# Altium PCB compactModalAccel.PcbDoc
Units mil, origin at the board's own origin, x right, y up, seen from the top; angles counter-clockwise.
Board outline 999.85 x 999.81 mil, 2 copper layers (Top Layer, Bottom Layer), stack 64.611 mil thick; 19 components, 17 nets, 78 pads, 6 vias.
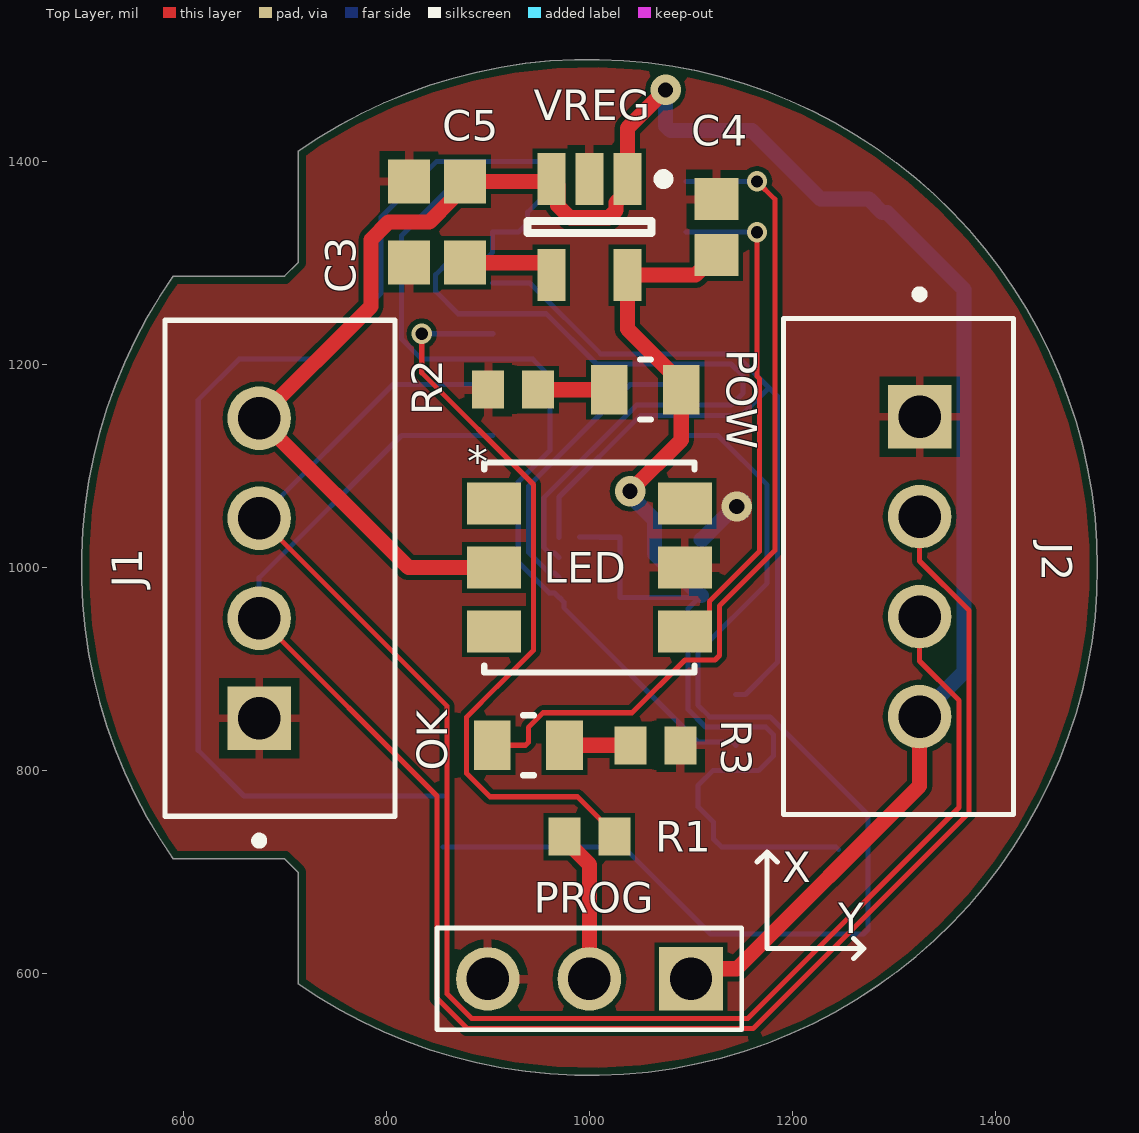
[diagram p0: Top Layer view]
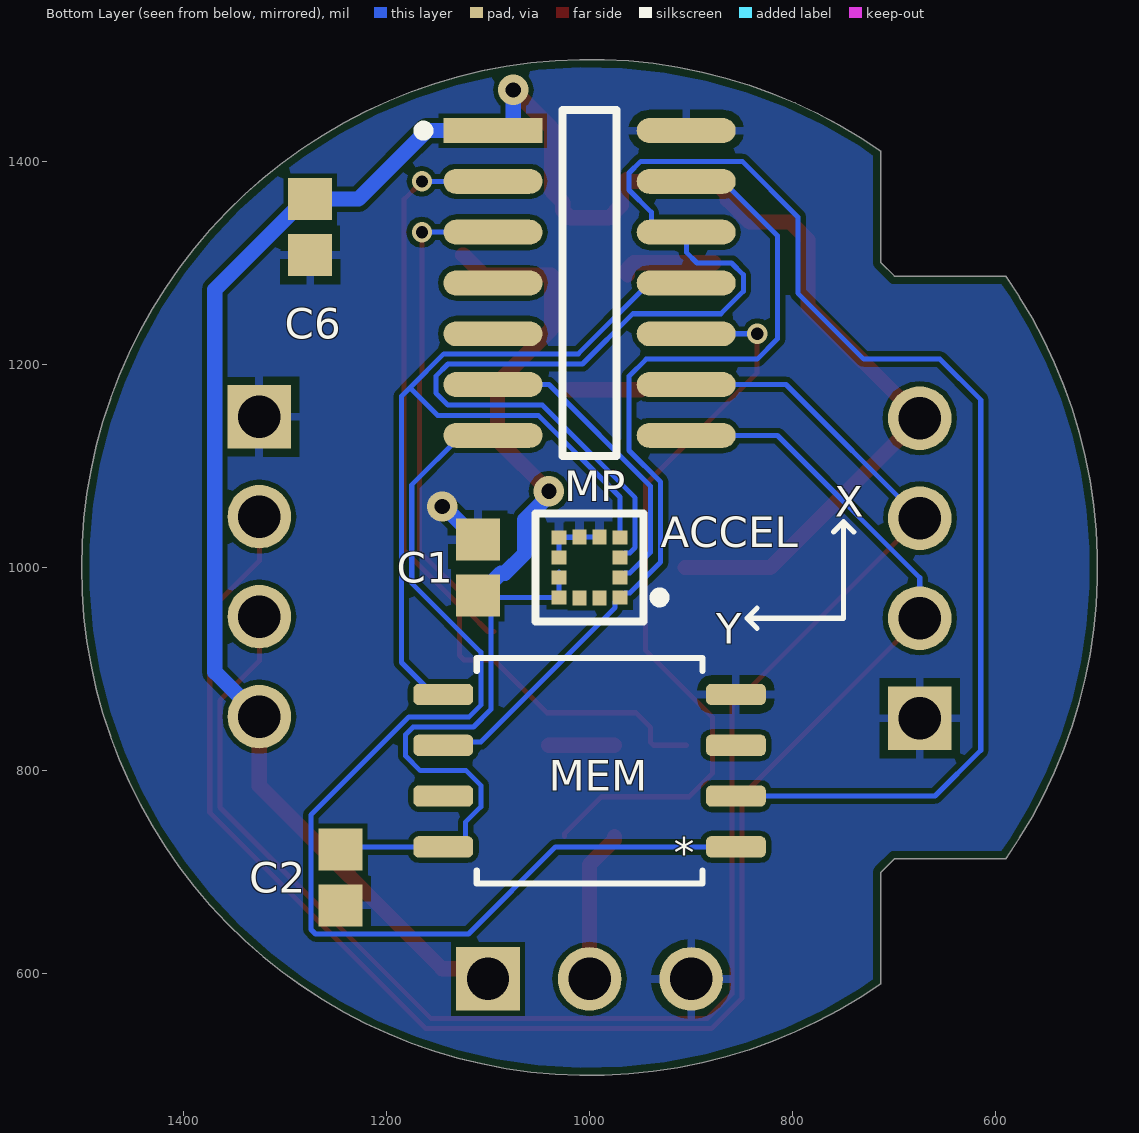
[diagram p1: Bottom Layer view, seen from below]
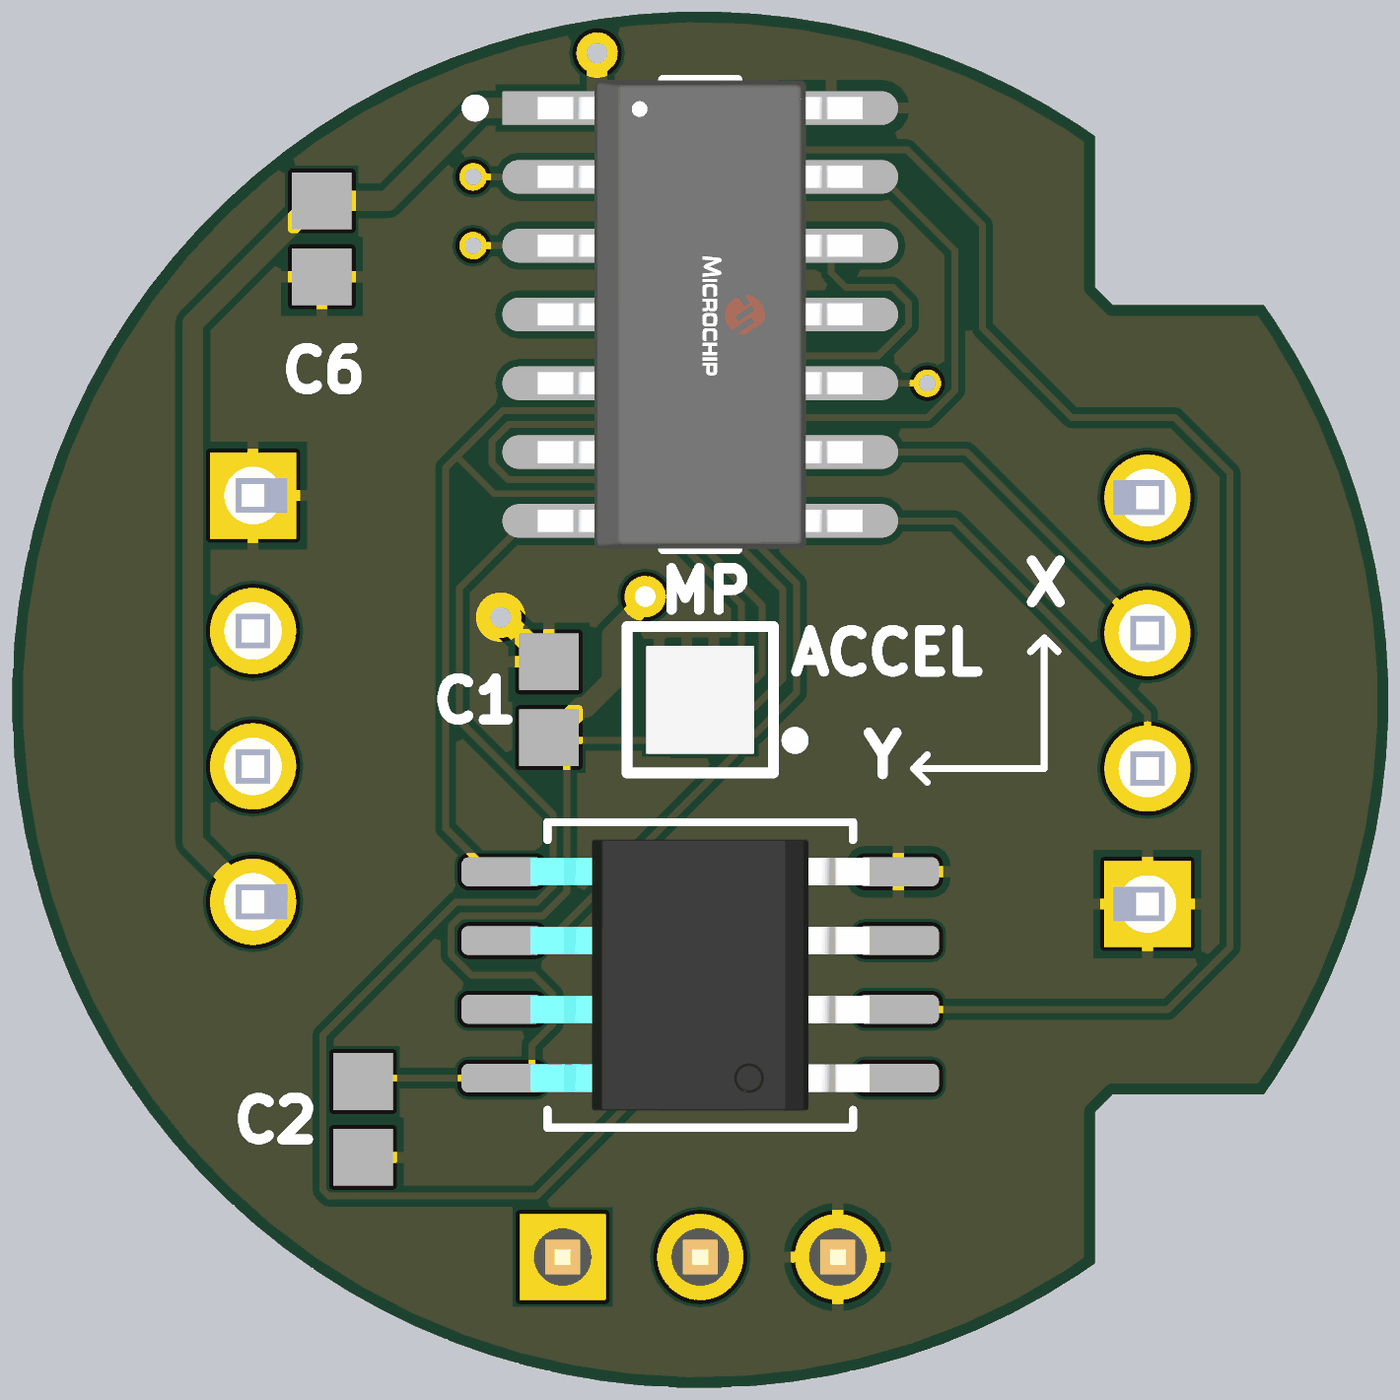
[diagram p2: 3D render of the assembled board from below, using the file's embedded part models]

## Layer stack, top to bottom
Top Solder: solder mask 0.4, Solder Resist, Dk 3.5
Top Layer: signal copper 1.4
Dielectric 1: dielectric 61.811, FR-4, Dk 4.8
Bottom Layer: signal copper 1.4
Bottom Solder: solder mask 0.4, Solder Resist, Dk 3.5

## Board outline
590.42,713.21 700,713.21 713.21,700 713.21,590.42 ccw(c1000,1000) 713.21,1409.58 713.21,1300 700,1286.79 590.42,1286.79 ccw(c1000,1000)

## Design rules (kind name [scope] priority, off if disabled: settings)
BoardOutlineClearance [All] p1: gap=7.87 ignorepadtopadclearanceinfootprint=FALSE
Clearance [All] p1: gap=5 ignorepadtopadclearanceinfootprint=FALSE
ComponentClearance [All] p1: gap=5 collisioncheckmode=3 verticalgap=5 showdistances=TRUE
DiffPairsRouting [All] p1: maxlimit=15 minlimit=8 mostfreqgap=8 toplayer_minwidth=8 toplayer_maxwidth=1000 toplayer_prefwidth=8 bottomlayer_minwidth=8 bottomlayer_maxwidth=1000 bottomlayer_prefwidth=8 maxuncoupledlength=500
Height [All] p1: minheight=0 maxheight=71497.94 prefheight=500
HoleSize [All] p1: absolutevalues=TRUE maxlimit=248.03 minlimit=8 maxpercent=80.000 minpercent=20.000
HoleToHoleClearance [All] p1: gap=9.84 allowstackedmicrovias=FALSE
MinimumAnnularRing [All] p1: minimumring=3
MinimumSolderMaskSliver [All] p1: minsoldermaskwidth=0
PlaneClearance [All] p1: clearance=8
PlaneConnect PlaneConnectPowerPads [InPadClass('PowerPads')] p1: planeconnectstyle=Direct reliefexpansion=20 reliefentries=4 reliefconductorwidth=10 reliefairgap=10
PlaneConnect [All] p2: pad.planeconnectstyle=Relief pad.reliefexpansion=11.81 pad.reliefentries=4 pad.reliefconductorwidth=8 pad.reliefairgap=8 via.planeconnectstyle=Direct via.reliefexpansion=11.81 via.reliefentries=4 via.reliefconductorwidth=5 via.reliefairgap=5
PolygonConnect PolygonConnectPowerPads [All vs (InPadClass('PowerPads'))] p1: connectstyle=Direct reliefconductorwidth=10 reliefentries=4 polygonreliefangle="90 Angle" airgapwidth=10
PolygonConnect [All] p2: thpad.connectstyle=Relief thpad.reliefconductorwidth=8 thpad.reliefentries=4 thpad.polygonreliefangle="90 Angle" thpad.airgapwidth=8 smdpad.connectstyle=Relief smdpad.reliefconductorwidth=8 smdpad.reliefentries=4 smdpad.polygonreliefangle="90 Angle" smdpad.airgapwidth=8 via.connectstyle=Direct via.reliefconductorwidth=5 via.reliefentries=4 via.polygonreliefangle="90 Angle" via.airgapwidth=5
RoutingVias [All] p1: holewidth=11.81 width=25 viastyle="Through Hole" minholewidth=11.81 minwidth=16 maxholewidth=23.62 maxwidth=259.84
SilkToSilkClearance [All] p1: silktosilkclearance=0
SilkToSolderMaskClearance [IsPad] p1: minsilkscreentomaskgap=5 clearancetoexposedcopper=TRUE
SolderMaskExpansion [All] p1: expansion=2.95 istentingtop=FALSE
Width [All] p1: maxlimit=1000 minlimit=5 preferedwidth=8 minimp=50.000000 maximp=50.000000 favimp=50.000000
20 further rules are at their usual default settings.

## Classes and differential pairs
component class compactModalAccel: ACCEL C1 C2 C3 C4 C5 C6 J1 J2 LED MP OK POW PROG R1 R2 R3 VREG

## Components (designator, comment, footprint, x,y, rotation, side; value= is the part's Value field where it differs from the comment)
ACCEL "LIS2DE12TR" FP-LGA-12-8365767-MFG 1000,1000 r0 bottom
C1 "100 nF" CAPC1608X95X40ML15T15 1110,1000 r90 bottom
C2 "100 nF" CAPC1608X95X40ML15T15 1245,695 r270 bottom
C3 "10 nF" CAPC1608X95X40ML15T15 850,1300 r180 top
C4 "10 nF" CAPC1608X95X40ML15T15 1125,1335 r90 top
C5 "1 uF" CAPC1608X95X40ML15T15 850,1380 r180 top
C6 "100 nF" CAPC1608X95X40ML15T15 1275,1335 r270 bottom
J1 "B4B-XH-A(LF)(SN)" JST_B4B-XH-A(LF)(SN) 675,851.57 r90 top
J2 "B4B-XH-A(LF)(SN)" JST_B4B-XH-A(LF)(SN) 1325,1148.43 r270 top
LED "WS2812" WS2812_WDS 1000,1000 r0 top
MEM "W25Q16JVSSIQ" W25Q16JVSSIQ_WIN 1000,800 r0 bottom
MP "ATTINY414-SSFR" FP-C04-065-SL-IPC_A 1000,1280 r180 bottom
OK "HSMH-C170" LED_HSMx-C170_AVA 940,825 r180 top
POW "HSMH-C170" LED_HSMx-C170_AVA 1055,1175 r0 top
PROG "Header_3pin" 3pinHeader 1100,595 r180 top
R1 "4.7k" RESC1609X50X30NL10T20 1000,735 r0 top
R2 "1k" RESC1609X50X30NL10T20 925,1175 r180 top
R3 "1k" RESC1609X50X30NL10T20 1065,825 r0 top
VREG "TC2014-3.3VCTTR" SOT-23-CT5_M 1000,1335 r270 top

## Footprints (in the part's own frame and the unit in brackets; to place one, negate y for a bottom-side part, rotate by r counter-clockwise, add the part's x,y. Pads: shape width x height; smd on the part's side, far side on the other; paste and mask are expansions set on the pad)
3pinHeader [mm] "Header, Vertical Receptacle, 2.54 mm pitch; 0.64 mm lead width, 3 pins, 1 row, 3 pins per row, 7.62 mm L X 2.54 mm W X 8.38 mm H body"
  rect 1.59x1.59 / inner round 1.59 / far side rect 1.59x1.59 hole 1.06 paste-1.59: 1(0,0)
  round 1.59 hole 1.06 paste-1.59: 2(2.54,0) 3(5.08,0)
  silkscreen extent -1.27,-1.27 6.35,1.27, body extent -1.27,-1.27 6.35,1.27, height 8.38
CAPC1608X95X40ML15T15 [mm] "Chip Capacitor, 2-Leads, Body 1.60x0.80mm, IPC Low Density"
  rect 1.05x1.1 smd: 1(-0.7,0) 2(0.7,0)
  body extent -0.88,-0.48 0.87,0.47, height 0.95
FP-C04-065-SL-IPC_A [mil]
  rect 97.4x24.49 smd paste+0 mask+0: 1(-95.12,150)
  rrect100% 97.4x24.49 smd paste+0 mask+0: 2(-95.12,100) 3(-95.12,50) 4(-95.12,0) 5(-95.12,-50) 6(-95.12,-100) 7(-95.12,-150) 8(95.12,-150) 9(95.12,-100) 10(95.12,-50) 11(95.12,0) 12(95.12,50) 13(95.12,100) 14(95.12,150)
  silkscreen extent -168,-170 27,170, body extent -118,-170 118,170, height 69
FP-LGA-12-8365767-MFG [mm]
  rect 0.375x0.35 smd paste-1000 mask+0: 1(-0.763,0.75) 2(-0.763,0.25) 3(-0.763,-0.25) 4(-0.763,-0.75) 7(0.763,-0.75) 8(0.763,-0.25) 9(0.763,0.25) 10(0.763,0.75)
  rect 0.35x0.375 smd paste-1000 mask+0: 5(-0.25,-0.763) 6(0.25,-0.763) 11(0.25,0.763) 12(-0.25,0.763)
  silkscreen extent -1.87,-1.35 1.35,1.35, body extent -1,-1 1,1, height 0.95
JST_B4B-XH-A(LF)(SN) [mm]
  rect 1.59x1.59 hole 1.06: 1(0,0)
  round 1.59 hole 1.06: 2(2.5,0) 3(5,0) 4(7.5,0)
  silkscreen extent -3.16,-3.4 9.95,2.35, body extent -2.45,-3.4 9.95,2.35, height 7
LED_HSMx-C170_AVA [mil]
  rect 36x49 smd paste+0 mask+0: 1(-35.5,0) 2(35.5,0)
  silkscreen extent -5,-30 5,30, body extent -39,-24 39,24, height 31
RESC1609X50X30NL10T20 [mm] "Chip Resistor, 2-Leads, Body 1.55x0.85mm, IPC Medium Density"
  rect 0.8x0.95 smd: 1(-0.625,0) 2(0.625,0)
  body extent -0.82,-0.48 0.82,0.48, height 0.5
SOT-23-CT5_M [mm] "SOT23, 5-Leads, Body 2.9x1.7mm, Pitch 0.95mm, Lead Span 2.8mm, IPC Low Density"
  rect 1.3x0.7 smd: 1(-1.2,0.95) 2(-1.2,0) 3(-1.2,-0.95) 4(1.2,-0.95) 5(1.2,0.95)
  silkscreen extent -1.32,-1.55 0.15,1.98, body extent -0.9,-1.55 0.9,1.55, height 1.45
W25Q16JVSSIQ_WIN [mil]
  rrect50% 59x21 smd: 1(-144,75) 2(-144,25) 3(-144,-25) 4(-144,-75) 5(144,-75) 6(144,-25) 7(144,25) 8(144,75)
  silkscreen extent -111,-111 111,111, body extent -123,-98 123,98, height 69
WS2812_WDS [mil]
  rect 53x41 smd paste+0 mask+0: 1(-94,63) 2(-94,0) 3(-94,-63) 4(94,-63) 5(94,0) 6(94,63)
  silkscreen extent -104,-104 104,104, body extent -106,-98 106,98, height 64

## Part data
ACCEL: library part CMP-12175-000009-1, "ACCEL 2-16G I2C/SPI 12LGA", Case/Package=LGA, Max Operating Temperature=85°C, Max Supply Voltage=3.6V, Min Operating Temperature=-40°C, Min Supply Voltage=1.7V, Axis="X, Y, Z", Bandwidth=0.5Hz, Contact Plating=Gold, Lead Free="Lead Free", Mount="Surface Mount", Number of Pins=12, Output Type=SPI, Packaging="Cut Tape", REACH SVHC="No SVHC"
C1 C2 C3 C4 C5 C6: library part CMP-2006-01550-1, Manufacturer=Vitramon, Part Number=VJ0603Y104KXQCW1BC
J1 J2: library part CMP-003-000002-1, "Connector Header Through Hole 4 position 0.098 (2.50mm)", Package=None, Availability=Warning, Check_prices=https://www.snapeda.com/parts/B4B-XH-A(LF)(SN)/JST%20Sales%20America%20Inc./view-part/447494/?ref=eda, Design Item ID=B4B-XH-A(LF)(SN), MF="JST Sales", MP=B4B-XH-A(LF)(SN), Price=None, Purchase-URL=https://pricing.snapeda.com/search/part/B4B-XH-A(LF)(SN)/?ref=eda, SnapEDA_Link=https://www.snapeda.com/parts/B4B-XH-A(LF)(SN)/JST%20Sales%20America%20Inc./view-part/447494/?ref=snap, Source=MainEnclosure.SchLib
LED: library part CMP-024-000000-2, "Addressable LED", Mfr_Name=Worldsemi, Copyright="Copyright (C) 2023 Ultra Librarian. All rights reserved.", Design Item ID=WS2812, Manufacturer_Part_Number=WS2812, RefDes=RefDes, Source=WS2812.SchLib, Type=DEV
MEM: library part CMP-021-000000-1, "No Description Available", Mfr_Name=Winbond, Copyright="Copyright (C) 2023 Ultra Librarian. All rights reserved.", Design Item ID=W25Q16JVSSIQ, Manufacturer_Part_Number=W25Q16JVSSIQ, RefDes=RefDes, Source=W25Q16JVSSIQ.SchLib, Type=DEV
MP: library part CMP-06276-000499-1, "IC MCU 8BIT 4KB FLASH 14SOIC", Case/Package=SOIC, Frequency=20MHz, Max Operating Temperature=125°C, Min Operating Temperature=-40°C, Core Architecture=AVR, Interface=I2C, Memory Size=4KB, Memory Type=FLASH, Mount="Surface Mount", Number of I/Os=12, Number of Pins=14, Oscillator Type=Internal, Packaging="Cut Tape", Peripherals="Brown-out Detect/Reset", Series="tinyAVR™ 1"
OK POW: library part CMP-005-000006-1, "No Description Available", Mfr_Name="Avago Technologies", Copyright="Copyright (C) 2023 Ultra Librarian. All rights reserved.", Design Item ID=HSMH-C170, Manufacturer_Part_Number=HSMH-C170, RefDes=RefDes, Source=HSMH-C170.SchLib, Type=DEV
PROG: library part CMP-003-000000-1, Design Item ID=Header_3pin, Source=MainEnclosure.SchLib
R1 R2 R3: library part CMP-2000-03412-1, Manufacturer="Vishay Dale", Part Number=CRCW06034K70FKTA
VREG: library part CMP-0136-00651-1, "50 mA, 100 mA, 150 mA CMOS LDOs with Shutdown and Reference Bypass, 5-Pin SOT-23, Extended Temperature, Tape and Reel", Code_IPC=SOT23-5, DatasheetVersion="revE, May-2006", PackageDescription="5-Lead Plastic Small Outline Transistor (CT) [SOT-23]", PackageReference=SOT-23-CT5, PackageVersion="revBB, Aug-2009"

## Via types
v1: diameter 20, hole 12, Top Layer to Bottom Layer, 3 vias
v2: diameter 30, hole 15, Top Layer to Bottom Layer, 3 vias

## Nets (pads, with @x,y where several pads share a name; then routed paths per layer and width w, separated by ;. In a path a pad name is that pad's centre, name@x,y a point inside that pad or via, vN(x,y) a via of type N, cw(c..) or ccw(c..) an arc to the next point about the centre after c; other vN are vias at no path point)
3V3: ACCEL.9 ACCEL.10 C1.1 C2.1 C4.1 MEM.8 POW.2 VREG.5 | length 1093.7
  Top Layer w15: v2(1040,1075) 1090.5,1125.5 POW.2 1090.5,1181.5 1037.4,1234.6 VREG.5 1104.33,1287.76 1124.02,1307.44 C4.1
  Bottom Layer w5: ACCEL.9@1030.02,995.45 ACCEL.9 ACCEL.10 C1.1@1108.03,970.47 ; C1.1 C1.1@1108.03,970.47 ; C2.1 1242.56,725 MEM.8 1130.04,725 1122.25,732.79 1122.25,749.22 1107,764.47 1107,785.53 1121.47,800 1166.53,800 1181,814.47 1181,835.53 1173.53,843 1114.33,843 1097,860.33 1097,959.44 C1.1@1108.03,970.47
  Bottom Layer w15: v2(1040,1075) 1040,1070.94 1064.08,1046.86 1064.08,1013.48 1083.17,994.39 1087.07,994.39 1109.02,972.44 C1.1
+5: C5.1 C6.1 J1.4 J2.4 LED.2 MP.1 PROG.1 VREG.1 VREG.3 | length 2157.3
  Top Layer w15: LED.2 821.85,1000 J1.4 785,1256.85 785,1322.56 802.44,1340 842.44,1340 864.39,1361.95 864.39,1366.83 C5.1 960.35,1380 VREG.3 968.88,1375.96 968.88,1356.32 981.04,1344.15 1018.96,1344.15 1026.28,1351.48 1026.28,1359.31 1037.4,1370.43 1037.4,1432.4 v2(1075,1470) ; PROG.1 1110.01,605.01 1145.01,605.01 1325,785 J2.4
  Bottom Layer w15: v2(1075,1470) 1075,1434.75 1079.75,1430 1160,1430 1227.44,1362.56 C6.1 1288.17,1349.39 1293.05,1349.39 1368.8,1273.64 1368.8,896.95 J2.4
ACC_SS: ACCEL.2 MP.6 | length 301.8
  Bottom Layer w5: ACCEL.2 965.59,994.55 960.4,994.55 940,1014.94 940,1080 1040,1180 MP.6
GND: ACCEL.5 ACCEL.6 ACCEL.7 ACCEL.8 C1.2 C2.2 C3.2 C4.2 C5.2 C6.2 J1.1 J2.1 LED.5 MEM.4 MP.14 PROG.3 R2.2 R3.2 VREG.2 | length 108.2
  Bottom Layer w5: ACCEL.5 ACCEL.6 1010.09,1029.77 1029.77,1029.77 ACCEL.7 ACCEL.8
  Bottom Layer w15: C1.2 1110.98,1027.56 1143.43,1060 v2(1145,1060)
I2C_SCL: J1.3 J2.3 MP.9 | length 1632.9
  Top Layer w5: J1.3 860,863.43 860,580.13 883.93,556.2 1156.2,556.2 1363.8,763.8 1363.8,869.22 1325,908.02 J2.3
  Bottom Layer w5: J1.3 806.57,1180 MP.9
I2C_SDA: J1.2 J2.2 MP.8 | length 1710
  Top Layer w5: J1.2 850,775 850,575.99 879.79,546.2 1161.2,546.2 1373.8,758.8 1373.8,957.65 1325,1006.45 J2.2
  Bottom Layer w5: J1.2 675,990 815,1130 MP.8
LED_BASIC: MP.2 OK.2 | length 835
  Top Layer w5: OK.2 937.07,825 940,827.93 940,842.61 954.39,857 1042,857 1094,909 1123.61,909 1128,913.39 1128,962.25 1182.5,1016.75 1182.5,1362.5 v1(1165,1380)
  Bottom Layer w5: MP.2 v1(1165,1380)
LED_DATA: LED.4 MP.3 | length 497.9
  Top Layer w5: LED.4 1100,937 1118,955 1118,966.39 1167.5,1015.89 1167.5,1185.63 1165,1188.13 v1(1165,1330)
  Bottom Layer w5: MP.3 v1(1165,1330)
MEM_SS: MEM.1 MP.7 | length 1125.3
  Bottom Layer w5: MEM.1 1033.41,725 1119.14,639.27 1269.76,639.27 1274.15,643.67 1274.15,756.52 1177.67,853 1118.47,853 1107,864.47 1107,916.51 1175,984.51 1175,1081.3 1126.3,1130 MP.7
MISO: ACCEL.3 MEM.2 MP.12 | length 1954.9
  Bottom Layer w5: MEM.2 660,775 615,820 615,1165 655,1205 730,1205 795,1270 795,1345 849.75,1399.75 949.51,1399.75 961.08,1388.18 961.08,1371.6 939.23,1349.75 939.23,1339 930.22,1330 MP.12 904.75,1329.87 904.75,1310.25 894.24,1299.75 860.24,1299.75 848.68,1288.18 848.68,1271.82 870.75,1249.75 957.45,1249.75 1006.94,1200.25 1139.25,1200.25 1151.32,1188.18 1151.32,1171.82 1139.5,1160 1046.6,1160 955.1,1068.5 955.1,1019.53 960.4,1014.23 965.59,1014.23 ACCEL.3
MOSI: ACCEL.4 MEM.5 MP.11 | length 933.6
  Bottom Layer w5: MP.11 941.33,1280 1011.08,1210.25 1143.39,1210.25 1176.82,1176.82 ; ACCEL.4 969.98,1069.24 1050.49,1149.75 1149.75,1149.75 1176.82,1176.82 ; MEM.5 1153.53,875 1185,906.47 1185,1168.64 1176.82,1176.82
NetC3_1: C3.1 VREG.4 | length 93.6
  Top Layer w15: C3.1 956.32,1300 962.6,1293.72 VREG.4
NetOK_1: OK.1 R3.1 | length 64.9
  Top Layer w15: OK.1 R3.1
NetPOW_1: POW.1 R2.1 | length 69.9
  Top Layer w15: R2.1 POW.1
NetPROG_2: PROG.2 R1.1 | length 150.2
  Top Layer w15: R1.1 975.39,732.05 1000,707.44 PROG.2
SPI_CLK: ACCEL.1 MEM.6 MP.13 | length 862.2
  Bottom Layer w5: MP.13 868.42,1380 815,1326.58 815,1225 835,1205 944.26,1205 961.08,1188.18 961.08,1115.22 930,1084.14 930,1005.26 960.4,974.86 965.59,974.86 ACCEL.1 ; ACCEL.1@970.47,970.47 974.86,966.08 974.86,960.4 1107,828.26 1140.74,828.26 MEM.6
UPDI: MP.10 R1.2 | length 748.7
  Top Layer w5: v1(835,1230) 835,1191.61 945,1081.61 945,918.39 909.61,883 909.39,883 879,852.61 879,797.39 902.1,774.3 988.26,774.3 1024.61,737.95 R1.2
  Bottom Layer w5: v1(835,1230) MP.10
pads on no net: ACCEL.11 ACCEL.12 LED.1 LED.3 LED.6 MEM.3 MEM.7 MP.4 MP.5

## Polygon pours and split planes (outlines as drawn)
GND on Bottom Layer "GND_L02_P001" (solid, pour order 1): 1000,500 cw(c1000,1000) 500,1000 cw(c1000,1000) 1000,1500 cw(c1000,1000) 1500,1000 cw(c1000,1000)
GND on Top Layer "GND_L01_P000" (solid, pour order 0): 1000,500 cw(c1000,1000) 500,1000 cw(c1000,1000) 1000,1500 cw(c1000,1000) 1500,1000 cw(c1000,1000)

## Silkscreen, mask and mechanical layers (free items; w line width, h text height)
Top Overlay:
  lines w5: 1165,710 1175,720 ; 1185,710 1175,720 ; 1260,615 1270,625 ; 1260,635 1270,625 ; 1175,720 1175,625 1270,625
  text "X" at 1190,690 h30
  text "Y" at 1245,640 h30
Bottom Overlay:
  lines w5: 740,1035 750,1045 ; 760,1035 750,1045 ; 835,940 845,950 ; 835,960 845,950 ; 750,1045 750,950 845,950
  text "X" at 730,1050 h30
  text "Y" at 850,925 h30
Mechanical 1:
  the board outline again, w5

## Text inside footprints (layer, text, board x,y; h text height)
LED: Top 3D Body "*" at 913.5,1054 h30; Top Overlay "*" at 880,1090 h30
MEM: Bottom Overlay "*" at 896.5,747 h30 r180; Bottom 3D Body "*" at 833.5,709 h30 r180